# Altium PCB Circular PCB - Radial.PcbDoc (part 3 of 4)
Units mm, origin at the board's own origin, x right, y up, seen from the top; angles counter-clockwise.
Board outline 100 x 100 mm, 6 copper layers (Top Layer, GND (Top), X, Y, GND (Bot), Bottom Layer), stack 1.599 mm thick; 194 components, 127 nets, 612 pads, 161 vias.
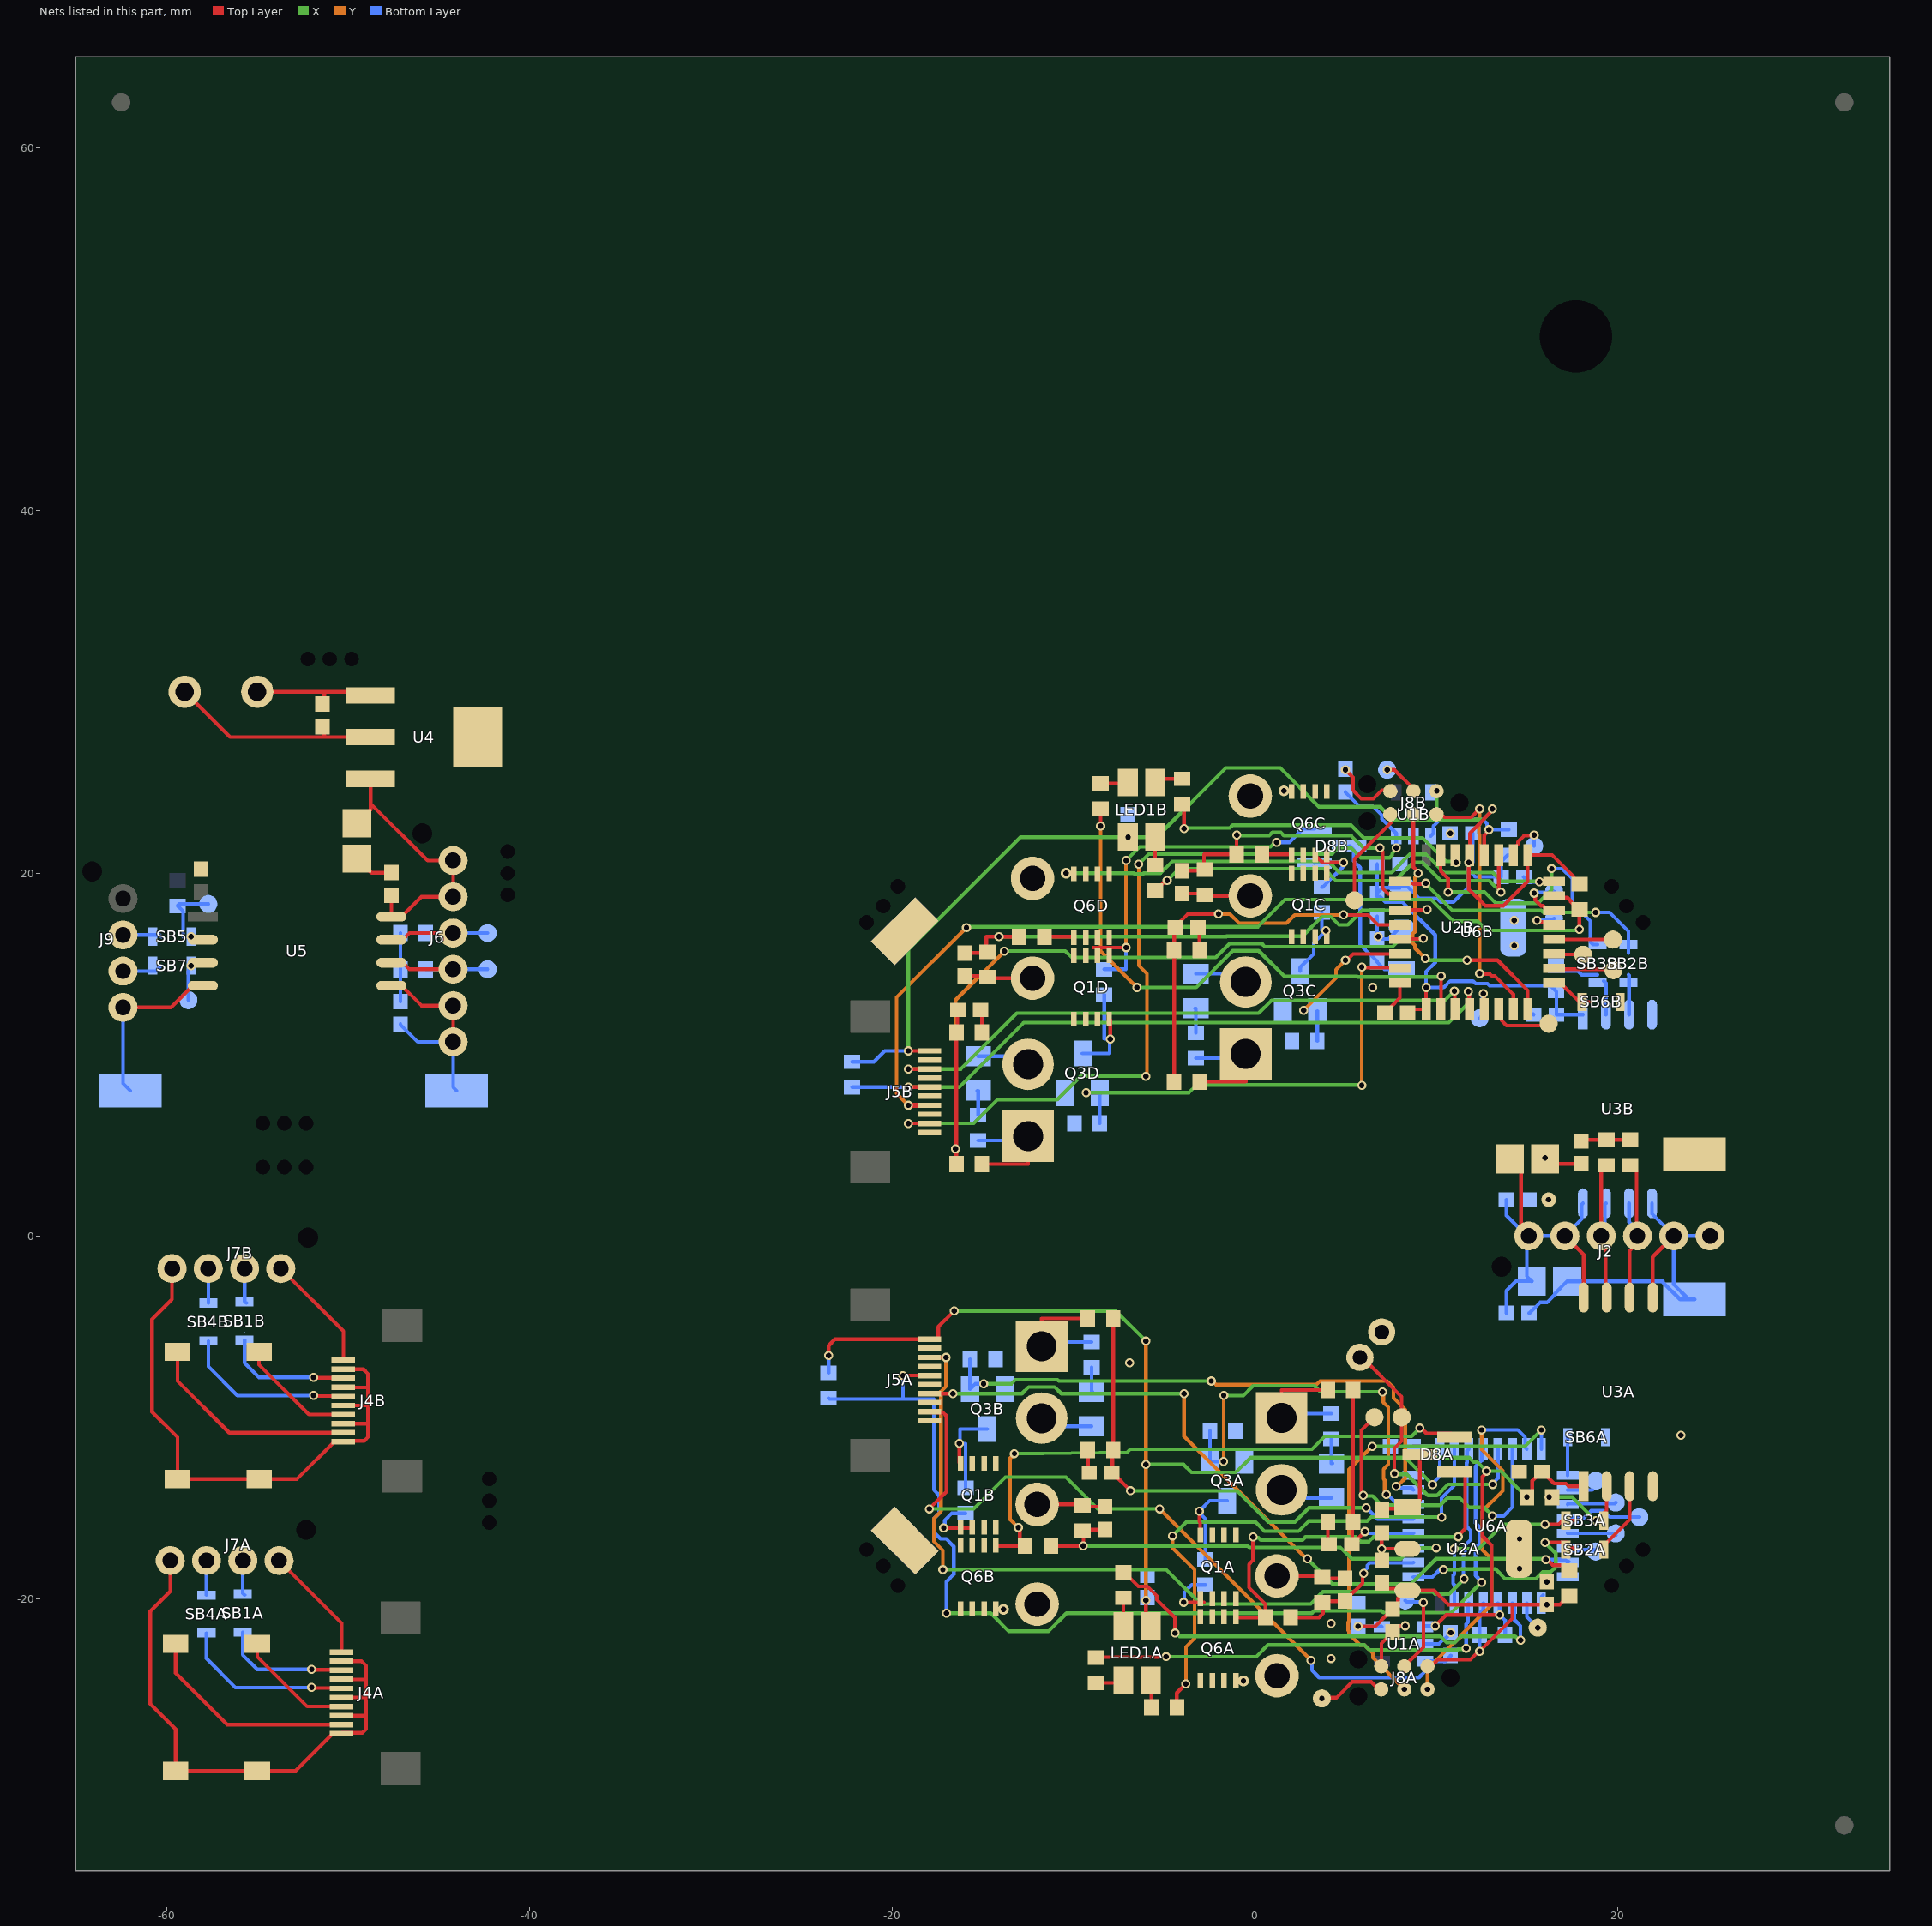
[diagram p6: the nets of this part, all layers, seen from the top]

## Via types
v1: diameter 0.5, hole 0.3, Top Layer to Bottom Layer, tented both sides, 151 vias
v2: diameter 0.5, hole 0.3, Top Layer to Bottom Layer, 4 vias
v3: diameter 0.6, hole 0.3, Top Layer to Bottom Layer, tented both sides, 4 vias
v4: diameter 0.8, hole 0.3, Top Layer to Bottom Layer, tented both sides, 2 vias

## Nets (pads, with @x,y where several pads share a name; then routed paths per layer and width w, separated by ;. In a path a pad name is that pad's centre, name@x,y a point inside that pad or via, vN(x,y) a via of type N, cw(c..) or ccw(c..) an arc to the next point about the centre after c; other vN are vias at no path point) (continued)
3V3A: C1A.1 C3A.1 C4A.1 C7A.1 C9A.1 C10A.1 C11A.1 J5A.1 J8A.1 LED1A.1 R8A.2 R9A.2 R10A.2 R37A.2 U1A.5 U2A.3 U3A.1 U6A.1 U6A.5 U6A.17 | length 102.7
  Top Layer w0.2: v1(-23.5,-6.6) -23.5,-6.05 -23.15,-5.7 J5A.1@-17.95,-5.7 -17.45,-5.7 -17.45,-5.01 v1(-16.58,-4.14) ; v1(-6,-20.1) -6,-21.25 LED1A.1@-5.75,-21.5 ; v1(5.7,-21.525) 6.65,-21.525 7.275,-20.9 7.3,-20.9 7.6,-20.6 C4A.1@7.6,-20.575 7.9,-20.275 7.9,-19.974 8.299,-19.575 U2A.3@8.4,-19.575 ; C3A.1@7,-19.15 7.25,-19.4 7.275,-19.4 7.314,-19.439 8.314,-19.439 U2A.3@8.425,-19.55 9.89,-19.55 10.665,-20.325 13.05,-20.325 ; J8A.1@9.52,-23.73 9.746,-23.73 10.114,-23.363 11.883,-23.363 12.346,-22.9 v1(12.4,-22.9) 14.2,-21.1 14.2,-20.325 ; v1(12.776,-12.967) 12.776,-13.049 12.551,-13.274 12.551,-16.55 13.05,-17.049 13.05,-20.325 ; v2(15,-14.4) 15.3,-14.1 15.3,-13.5 C7A.1@15.8,-13 ; C7A.1@15.825,-13 15.85,-13 16.5,-13.65 17.154,-13.65 17.305,-13.801 U3A.1@18.13,-13.801 ; R9A.2@17.35,-19.85 17.3,-19.85 16.825,-20.325 v1(16.1,-20.325) 14.2,-20.325 ; 13.05,-20.325 14.2,-20.325
  X w0.2: v1(-16.58,-4.14) -7.66,-4.14 v1(-6,-5.8) ; v1(-6,-12.6) -3.93,-12.6 -3.492,-13.037 -1.048,-13.037 -0.235,-12.225 8.316,-12.225 ; v1(9.798,-13.707) 8.316,-12.225 ; v2(15,-14.4) 13.567,-12.967 v1(12.776,-12.967) 12.28,-12.471 12.071,-12.471 11.825,-12.225 8.316,-12.225
  Y w0.2: v1(-6,-20.1) v1(-6,-12.6) v1(-6,-5.8)
  Bottom Layer w0.2: R37A.2@-23.5,-7.55 v1(-23.5,-6.6) ; v1(5.7,-21.525) 5.712,-21.537 6.987,-21.537 U1A.5@7,-21.55 ; C1A.1@8.725,-11.6 10.1,-11.6 10.2,-11.7 U6A.17@10.2,-11.75 10.2,-13.251 9.798,-13.653 v1(9.798,-13.707) ; v1(12.4,-22.9) R8A.2@12.4,-22 12.4,-20.8 12.6,-20.6 U6A.5@12.6,-20.25 ; U6A.1@15.8,-20.25 15.8,-19.9 U6A.1@15.9,-19.8
3V3B: C1B.1 C3B.1 C4B.1 C7B.1 C9B.1 C10B.1 C11B.1 J5B.1 J8B.1 LED1B.1 R8B.2 R9B.2 R10B.2 R37B.2 U1B.5 U2B.3 U3B.1 U6B.1 U6B.5 U6B.17 | length 97.4
  Top Layer w0.2: v1(-19.1,10.2) J5B.1@-17.95,10.2 ; C1B.1@8.425,12.3 8.625,12.5 U6B.17@9.45,12.5 v1(9.45,13.7) ; J8B.1@10.02,24.52 v1(10.032,24.532) ; v1(11.8,20.591) 11.8,19.1 12.7,18.2 13.7,18.2 15.05,19.55 U6B.1@15.05,21 16.395,21 17.6,19.795 17.6,19.65 17.85,19.4 R9B.2@17.9,19.4 ; U6B.5@11.85,21 11.85,22.199 12.651,23 12.651,23.024 13.1,23.472 v1(13.1,23.552)
  X w0.2: v1(-19.1,10.2) -19.1,15.8 -12.912,21.988 v1(-6.987,21.988) -5.412,21.988 -1.6,25.8 1.4,25.8 3.534,23.666 6.922,23.666 7.638,22.95 10,22.95 ; v1(10.032,24.532) 10.032,22.982 10,22.95 ; v1(13.1,23.552) 13.1,23.472 12.578,22.95 10,22.95
  Bottom Layer w0.2: R37B.2@-22.2,9.6 -21,9.6 -20.4,10.2 v1(-19.1,10.2) ; C4B.1@6.75,20.5 C3B.1@6.75,18.875 ; U1B.5@9.7,24.45 U1B.5@9.7,24.6 ; C10B.1@12.025,22.2 12.025,20.591 v1(11.8,20.591) 11.8,20.1 ; C9B.1@13.463,19.8 12.154,19.8 11.854,20.1 11.8,20.1 ; C9B.1@13.575,19.8 13.575,20.625 13.95,21 R8B.2@14,21 ; U3B.1@18.094,12.2 C7B.1@16.625,12.2 16.625,13.475 16.3,13.8 12.939,13.8 12.828,13.911 12.172,13.911 12.036,14.048 10.774,14.048 10.427,13.7 v1(9.45,13.7) 9.45,14.572 9.95,15.072 9.95,16.599 8.149,18.4 7.2,18.4 6.9,18.7 6.75,18.7 C3B.1@6.75,18.875 ; C3B.1@6.75,18.875 6.75,18.9 7.05,19.2 8,19.2 U2B.3@8.1,19.3 8.386,19.3 9.086,18.6 10.059,18.6 10.244,18.415 10.955,18.415 11.8,19.259 11.8,20.1
9V_BATT: C15.1 TP14.1 U4.1 | length 7
  Top Layer w0.2: TP14.1@-55,30 -48.95,30 U4.1@-48.75,29.8 ; C15.1@-51.4,29.325 -51.3,29.425 -51.3,30
BOOT0A: J5A.7 R9A.1 U6A.31 | length 43.5
  Top Layer w0.2: J5A.7@-17.95,-8.7 v1(-16.65,-8.7) ; v1(16.047,-17.847) 16.129,-17.847 16.431,-18.15 17.05,-18.15 R9A.1@17.35,-18.45
  X w0.2: v1(-16.65,-8.7) -12.836,-8.7 -12.463,-8.328 -11.037,-8.328 -10.664,-8.7 v1(-3.9,-8.7) ; v1(2.9,-17.8) 4.3,-19.2 8.6,-19.2 10,-17.8 16,-17.8 v1(16.047,-17.847)
  Y w0.2: v1(-3.9,-8.7) -3.9,-11.058 2.842,-17.8 v1(2.9,-17.8)
  Bottom Layer w0.2: v1(16.047,-17.847) 16.597,-17.847 16.6,-17.85 17.1,-17.85 U6A.31@17.25,-18 U6A.31@17.3,-17.95
BOOT0B: J5B.7 R9B.1 U6B.31 | length 50.8
  Top Layer w0.2: U6B.31@16.5,18.75 16.6,18.65 17.249,18.65 17.425,18.474 17.425,18.425 R9B.1@17.85,18 ; v1(17.9,16.9) R9B.1@17.9,18
  Top Layer w0.3: v1(-19.1,7.2) J5B.7@-17.95,7.2
  X w0.2: v1(-15.9,17) -15.85,17.05 0.171,17.05 1.671,18.55 9.728,18.55 10.927,17.351 12.275,17.351 12.776,16.85 17.85,16.85 v1(17.9,16.9)
  Y w0.2: v1(-19.1,7.2) -19.75,7.85 -19.75,13.15 v1(-15.9,17)
CANHA: J2.3 R13.2 U3A.7 U3B.7 | length 9.5
  Top Layer w0.2: U3A.7@19.4,-3.4 19.335,-3.335 19.335,-0.235 J2.3@19.1,0 19.1,3.6 R13.2@19.4,3.9
  Bottom Layer w0.2: J2.3@19.1,0 19.3,0.2 19.3,1.734 U3B.7@19.365,1.799
CANLA: J2.4 R14.2 U3A.6 U3B.6 | length 9.7
  Top Layer w0.2: U3A.6@20.67,-3.4 20.67,-0.809 21.1,-0.379 J2.4@21.1,0 21.05,0.05 21.05,3.6 20.75,3.9 R14.2@20.7,3.9
  Bottom Layer w0.2: U3B.6@20.635,1.799 20.635,0.764 21.1,0.299 J2.4@21.1,0
GND: C18.2 J9.4 TP21.1 U5.4 | length 9.7
  Top Layer w0.2: J9.4@-62.4,12.6 -59.751,12.6 -58.556,13.795 U5.4@-58.001,13.795
  Bottom Layer w0.2: J9.4@-62.4,12.6 -62.4,8.4 TP21.1@-62,8
GNDA: C1A.2 C2A.2 C3A.2 C4A.2 C7A.2 C8A.2 C9A.2 C10A.2 C11A.2 C12A.2 C12B.2 C13A.2 C13B.2 J1A.2 J1B.2 J3A.2 J3B.2 J5A.2 J5A.4 J5A.6 J5A.8 J5A.10 J8A.5 LED2A.1 LED2B.1 pad.1@7,-5.3 Q3A.2 Q3B.2 Q6A.4 Q6B.4 R3A.1 R3B.1 R4A.1 R4B.1 R12A.1 R12B.1 SB6A.1 TP1A.1 TP2A.1 U1A.2 U2A.2 U2A.4 U3A.4 U6A.16 U6A.32 | length 25.6
  Top Layer w0.2: Q6B.4@-14.275,-20.553 -14.238,-20.59 v3(-13.85,-20.59) ; J1B.2@-12,-14.8 -9.45,-14.8 R4B.1@-9.45,-14.89 ; R4B.1@-9.55,-14.89 -9.55,-14.925 C12B.2@-8.25,-14.925 ; R12B.1@-9.2,-11.8 -9.2,-13.09 C13B.2@-9.15,-13.09 ; Q6A.4@-1.05,-24.5 -1.013,-24.537 v3(-0.625,-24.537) ; J1A.2@1.225,-18.747 3.675,-18.747 3.775,-18.747 R4A.1@3.775,-18.837 ; R4A.1@3.675,-18.837 3.675,-18.872 3.775,-18.872 C12A.2@4.975,-18.872 ; R12A.1@4.025,-15.747 4.025,-17.037 C13A.2@4.075,-17.037 ; J8A.5@6.98,-23.73 6.98,-22.47 7.6,-21.85 C4A.2@7.6,-21.825 7.6,-21.8 7.9,-21.5 v1(8.3,-21.5) ; C3A.2@7,-17.875 v1(7,-17.25) ; C2A.2@7,-16.375 v1(7,-17.25) ; U2A.2@8.425,-17.25 v1(7,-17.25)
  Bottom Layer w0.2: J3B.2@-11.65,-9.89 -11.65,-10.5 LED2B.1@-9,-10.5 ; J3A.2@1.575,-13.837 1.575,-14.447 LED2A.1@4.225,-14.447 ; U1A.2@9.4,-22.5 10.15,-22.5 10.45,-22.2 10.5,-22.2 10.8,-21.9 v1(10.8,-21.875)
  other v1: 4.2,-23.3 4.2,-21.375 16.1,-19.075 14.6,-18.35 14.6,-16.7 23.5,-11 -6.9,-7
GNDB: C1B.2 C2B.2 C3B.2 C4B.2 C7B.2 C8B.2 C9B.2 C10B.2 C11B.2 C12C.2 C12D.2 C13C.2 C13D.2 J1C.2 J1D.2 J3C.2 J3D.2 J5B.2 J5B.4 J5B.6 J5B.8 J5B.10 J8B.5 LED2C.1 LED2D.1 Q3C.2 Q3D.2 Q6C.4 Q6D.4 R3C.1 R3D.1 R4C.1 R4D.1 R12C.1 R12D.1 SB6B.1 TP1B.1 TP2B.1 U1B.2 U2B.2 U2B.4 U3B.4 U6B.16 U6B.32 | length 58
  Top Layer w0.2: C12D.2@-16,14.335 -14.7,14.335 R4D.1@-14.7,14.3 ; C13D.2@-15.1,12.5 -15.05,12.5 R12D.1@-15.05,11.21 ; R4D.1@-14.8,14.3 -14.8,14.21 J1D.2@-12.25,14.21 ; v3(-10.4,20) -10.012,20 Q6D.4@-9.975,19.963 ; C12C.2@-4,18.875 -2.7,18.875 R4C.1@-2.7,18.84 ; C13C.2@-3.1,17.04 -3.05,17.04 R12C.1@-3.05,15.75 ; R4C.1@-2.8,18.84 -2.8,18.75 J1C.2@-0.25,18.75 ; v3(1.6,24.54) 1.988,24.54 Q6C.4@2.025,24.503 ; v1(5,25.7) 5.413,25.287 5.413,24.571 5.88,24.104 6.54,24.104 7.007,24.571 7.429,24.571 J8B.5@7.48,24.52 ; C1B.2@7.175,12.3 7.2,12.3 7.5,12.6 7.5,12.625 8,13.125 U6B.16@8,13.95 ; v1(15.704,19.531) 15.714,19.54 16.49,19.54 U6B.32@16.5,19.55
  X w0.2: v3(-10.4,20) -6.678,20 -6.628,19.95 -6.172,19.95 -6.122,20 -5.205,20 -4.555,20.65 4.063,20.65 4.672,20.041 7.545,20.041 8.548,21.044 9.441,21.044 10.444,20.041 13.119,20.041 13.61,19.55 v1@15.704,19.55
  Bottom Layer w0.2: LED2D.1@-15.25,9.91 -12.6,9.91 J3D.2@-12.6,9.3 ; LED2C.1@-3.25,14.45 -0.6,14.45 J3C.2@-0.6,13.84 ; C3B.2@6.75,17.625 C2B.2@6.75,16.375 7.374,16.375 U2B.2@7.999,17 ; C4B.2@8,20.5 8.025,20.5 8.75,21.225 U1B.2@8.75,22.05 ; C9B.2@14.825,19.8 15.094,19.531 v1(15.704,19.531) ; C7B.2@15.35,12.225 C7B.2@15.375,12.2
  other v1: 6.5,13.7 14.3,16 6.8,16.5 14.3,17.4 10.775,22.2
ISO_5V: C16.1 C17.1 J6.1 J6.2 U4.3 U5.8 | length 15.7
  Top Layer w0.2: C17.1@-49.5,22.75 -49.475,22.75 -48.8,23.425 -48.8,23.45 -48.75,23.5 -48.75,23.848 ; U4.3@-48.75,25.2 -48.75,23.848 ; C16.1@-47.6,18.775 U5.8@-47.599,17.605 -47.044,17.605 -45.949,18.7 J6.2@-44.2,18.7 J6.1@-44.2,20.7 -45.602,20.7 -48.75,23.848
ISO_5VA: C5A.1 C5B.1 C6A.1 C6B.1 J2.1 J2.2 U3A.8 U3B.8 | length 20.6
  Top Layer w0.2: C6B.1@14.05,4.25 14.675,3.625 14.675,0.677 15,0.352 J2.1@15,0 ; J2.2@17.1,0 18.13,-1.03 U3A.8@18.13,-3.4
  Bottom Layer w0.2: C5A.1@13.875,-4.25 13.875,-3.021 14.397,-2.5 C6A.1@15.275,-2.5 15,-2.225 15,0 13.875,1.125 C5B.1@13.875,2 C5B.1@13.878,2.003 ; J2.1@15.1,0 J2.2@17.1,0 18.03,0.93 18.03,1.734 U3B.8@18.095,1.799
ISO_GND: C15.2 C16.2 C17.2 C19.2 J6.5 J6.6 TP15.1 TP22.1 U4.2 U4.4 U5.5 | length 26.1
  Top Layer w0.2: TP15.1@-59,30 -56.5,27.5 U4.2@-48.75,27.5 ; C15.2@-51.4,28.075 -51.3,27.975 -51.3,27.5 ; C17.2@-49.5,20.8 -49.475,20.8 -48.7,20.025 C16.2@-47.6,20.025 ; U5.5@-47.599,13.795 -47.044,13.795 -45.949,12.7 J6.5@-44.2,12.7 J6.6@-44.2,10.7
  Bottom Layer w0.2: C19.2@-47.1,11.675 -47.1,11.65 -46.15,10.7 J6.6@-44.2,10.7 -44.2,8.2 TP22.1@-44,8
ISO_GNDA: C5A.2 C5B.2 C6A.2 C6B.2 C14.2 J2.5 J2.6 TP16A.1 TP16B.1 U3A.5 U3B.5 | length 24.5
  Top Layer w0.2: C6B.2@16,4.25 16.275,3.975 C14.2@18,3.975 ; U3A.5@21.94,-3.4 21.94,-1.16 J2.5@23.1,0
  Bottom Layer w0.2: C5A.2@15.125,-4.25 15.15,-4.25 15.733,-3.667 16.107,-3.667 16.55,-3.224 16.55,-3.175 C6A.2@17.225,-2.5 22.5,-2.5 22.5,-2.55 23.45,-3.5 TP16A.1@23.925,-3.5 ; U3B.5@21.905,1.799 21.905,1.219 23.1,0.024 J2.5@23.1,0 ; TP16A.1@24.25,-3.5 TP16A.1@23.925,-3.5 ; J2.6@25.1,0 J2.5@23.1,0 ; J2.5@23.1,0 23.1,-2.675 TP16A.1@23.925,-3.5
  other v4: 16.2,2 16,4.3
LED_BLUEA: R5A.1 U6A.18 | length 30.1
  Top Layer w0.2: R5A.1@-4.3,-26 -4.3,-25.2 v1(-3.8,-24.7)
  X w0.2: v1(-4.539,-16.539) -3.77,-15.77 0.034,-15.77 0.534,-16.27 2.416,-16.27 2.962,-15.724 6.19,-15.724 6.414,-15.5 v1(10.3,-15.5)
  Y w0.2: v1(-4.539,-16.539) -4.539,-17.191 -3.325,-18.404 -3.325,-22.18 -3.8,-22.655 v1(-3.8,-24.7)
  Bottom Layer w0.2: v1(10.3,-15.5) 10.3,-14.45 11,-13.75 U6A.18@11,-11.75
LED_BLUEB: R5B.1 U6B.18 | length 30.7
  Top Layer w0.2: v1(-8.5,22.6) R5B.1@-8.5,23.55 ; U6B.18@10.25,12.5 10.275,12.525 v1@10.275,14.325
  X w0.2: v1(-6.5,13.7) -3.236,13.7 -1.213,15.722 0.213,15.722 1.636,14.3 5.65,14.3 5.672,14.278 10.227,14.278 v1(10.274,14.326)
  Y w0.2: v1(-8.5,22.6) -8.5,15.7 v1(-6.5,13.7)
LED_GREENA: R6A.1 U6A.6 | length 23.4
  Top Layer w0.2: R6A.1@-8.75,-23.25 -8.725,-23.225 -4.925,-23.225 v1(-4.9,-23.2)
  X w0.2: v1(-4.9,-23.2) 0.08,-23.2 0.729,-22.552 6.04,-22.552 6.314,-22.825 11.194,-22.825 11.228,-22.79 11.593,-22.79 v1(11.65,-22.733)
  Bottom Layer w0.2: v1(11.65,-22.733) 11.65,-21.405 11.755,-21.3 11.755,-20.295 U6A.6@11.8,-20.25
LED_GREENB: R6B.1 U6B.6 | length 17.8
  Top Layer w0.2: R6B.1@-4,23.8 -3.9,23.7 v1(-3.9,22.452) ; U6B.6@11.05,21 11.05,20.641 v1(11.1,20.591)
  X w0.2: v1(-3.9,22.452) -3.852,22.5 -1.378,22.5 -1.228,22.65 0.802,22.65 0.804,22.652 1.591,22.652 1.592,22.65 5.301,22.65 6.001,21.95 9.25,21.95 10.552,20.648 11.043,20.648 v1(11.1,20.591)
LED_REDA: R7A.1 U6A.3 | length 26.6
  Top Layer w0.2: R7A.1@-7.25,-18.55 -7.2,-18.55 -6.424,-19.326 -5.926,-19.326 -5.4,-19.851 -5.4,-20.055 -4.4,-21.055 v1(-4.4,-21.9)
  X w0.2: v1(-4.4,-21.9) -4.319,-21.9 -4.144,-22.075 10.222,-22.075 10.572,-22.425 11.028,-22.425 11.378,-22.075 14.347,-22.075 14.572,-22.3 v1(14.65,-22.3)
  Bottom Layer w0.2: U6A.3@14.2,-20.25 14.3,-20.35 14.3,-21.155 14.65,-21.505 v1(14.65,-22.3)
LED_REDB: R7B.1 U6B.3 | length 23
  Top Layer w0.2: R7B.1@-5.5,19.05 -5.45,19.05 -4.947,19.553 -4.875,19.553 v1(-4.837,19.591) ; U6B.3@13.45,21 13.45,19.128 13.573,19.004 v1(13.573,18.95)
  X w0.2: v1(-4.837,19.591) -4.177,20.25 3.827,20.25 4.486,19.591 7.731,19.591 8.734,20.594 9.255,20.594 10.258,19.591 12.933,19.591 v1(13.573,18.95)
LPUART1_RXA: SB2A.1 U6A.9 | length 11.9
  Top Layer w0.2: v2(16,-16.9) 17.212,-16.9 SB2A.1@17.612,-17.3
  X w0.2: v1(10.4,-18.4) 11.276,-18.4 11.308,-18.368 13.268,-18.368 13.8,-18.9 15.497,-18.9 15.872,-18.525 16.328,-18.525 16.597,-18.255 16.597,-17.497 v2(16,-16.9)
  Bottom Layer w0.2: U6A.9@8.75,-18.8 9.8,-18.8 10.162,-18.438 10.362,-18.438 v1(10.4,-18.4)
LPUART1_RXB: SB2B.1 U6B.9 | length 15
  Top Layer w0.2: U6B.9@8,19.55 8.1,19.45 8.701,19.45 8.758,19.394 9.335,19.394 9.384,19.443 v1(9.438,19.443)
  X w0.2: v1(9.438,19.443) 9.438,19.405 10.893,17.95 15.792,17.95 15.907,17.835 v1(18.8,17.835)
  Bottom Layer w0.2: v1(18.8,17.835) 19.565,17.835 20.6,16.8 SB2B.1@20.6,15.6
LPUART1_TXA: SB3A.1 U6A.7 | length 10.3
  Top Layer w0.2: v1(16,-15.9) 16.747,-15.9 16.947,-15.7 SB3A.1@17.612,-15.7
  X w0.2: v1(11,-17.25) 12.35,-17.25 13.7,-15.9 v1(16,-15.9)
  Bottom Layer w0.2: U6A.7@11,-20.25 11,-19.231 10.936,-19.167 10.936,-18.713 11,-18.649 v1(11,-17.25)
LPUART1_TXB: SB3B.1 U6B.7 | length 15.4
  Top Layer w0.2: U6B.7@10.25,21 10.25,20.116 10.657,19.71 v1(10.657,18.965)
  X w0.2: v1(10.657,18.965) 12.665,18.965 13.279,18.35 15.628,18.35 16.367,19.089 v1(16.367,20.25)
  Bottom Layer w0.2: v1(16.367,20.25) 16.95,20.25 17.5,19.7 17.5,18.358 18.5,17.358 18.5,16.212 18.65,16.063 SB3B.1@18.9,16.063
NetC2A_1: C2A.1 D8A.3 U2A.1 | length 4.8
  Top Layer w0.2: C2A.1@7,-15.125 7.088,-15.037 8.338,-15.037 U2A.1@8.425,-14.95 8.711,-14.95 9.1,-14.561 D8A.3@9.1,-12.05
NetC2B_1: C2B.1 D8B.3 U2B.1 | length 8.6
  Bottom Layer w0.2: D8B.3@5.2,21.5 5.25,21.5 5.45,21.3 5.45,20.668 5.813,20.305 5.813,16.063 6.426,15.45 6.45,15.45 6.75,15.15 C2B.1@6.75,15.125 6.75,15.1 7.15,14.7 U2B.1@8.1,14.7
NetC14_1: C14.1 R13.1 R14.1 | length 2.7
  Top Layer w0.2: C14.1@18,5.225 18.075,5.3 R14.1@20.7,5.3
NetC19_1: C19.1 R16.1 R17.1 | length 3.8
  Bottom Layer w0.2: C19.1@-47.1,12.925 R17.1@-47.1,16.7
NetJ1A_1: J1A.1 Q6A.1 Q6A.2 Q6A.3
NetJ1B_1: J1B.1 Q6B.1 Q6B.2 Q6B.3
NetJ1C_1: J1C.1 Q6C.1 Q6C.2 Q6C.3
NetJ1D_1: J1D.1 Q6D.1 Q6D.2 Q6D.3
NetJ3A_1: J3A.1 Q1A.1 Q1A.2 Q1A.3 R11A.2 R22A.2 | length 7.1
  Top Layer w0.2: J3A.1@1.475,-10.037 1.475,-8.497 R11A.2@4.025,-8.497
  Bottom Layer w0.2: J3A.1@1.475,-10.037 1.475,-9.797 R22A.2@4.225,-9.797
NetJ3B_1: J3B.1 Q1B.1 Q1B.2 Q1B.3 R11B.2 R22B.2 | length 7.1
  Top Layer w0.2: J3B.1@-11.75,-6.09 -11.75,-4.55 R11B.2@-9.2,-4.55
  Bottom Layer w0.2: J3B.1@-11.75,-6.09 -11.75,-5.85 R22B.2@-9,-5.85
NetJ3C_1: J3C.1 Q1C.1 Q1C.2 Q1C.3 R11C.2 R22C.2 | length 7.1
  Top Layer w0.2: R11C.2@-3.05,8.5 -0.5,8.5 J3C.1@-0.5,10.04
  Bottom Layer w0.2: R22C.2@-3.25,9.8 -0.5,9.8 J3C.1@-0.5,10.04
NetJ3D_1: J3D.1 Q1D.1 Q1D.2 Q1D.3 R11D.2 R22D.2 | length 7.1
  Top Layer w0.2: R11D.2@-15.05,3.96 -12.5,3.96 J3D.1@-12.5,5.5
  Bottom Layer w0.2: R22D.2@-15.25,5.26 -12.5,5.26 J3D.1@-12.5,5.5
NetJ4A_1: J4A.1 J4A.3 J4A.5 J4A.7 J4A.9 J7A.4 SW1A.1 SW2A.1 | length 33.2
  Top Layer w0.2: J7A.4@-59.8,-17.9 -59.8,-19.6 -60.9,-20.7 -60.9,-25.8 -59.5,-27.2 SW2A.1@-59.5,-29.5 SW1A.1@-55,-29.5 -52.9,-29.5 -50.85,-27.45 J4A.1@-50.35,-27.45 -50.3,-27.4 -49.2,-27.4 -49,-27.2 -49,-26.5 ; J4A.3@-50.35,-26.45 -49.05,-26.45 -49,-26.5 ; J4A.5@-50.35,-25.45 -49.05,-25.45 -49,-25.5 ; J4A.7@-50.35,-24.45 -49.05,-24.45 -49,-24.4 ; J4A.9@-50.35,-23.45 -49.25,-23.45 -49,-23.7 -49,-24.4 ; -49,-26.5 -49,-25.5 ; -49,-25.5 -49,-24.4
NetJ4A_2: J4A.2 SW2A.2 | length 11.9
  Top Layer w0.2: SW2A.2@-59.5,-22.5 -59.5,-24.1 -56.65,-26.95 J4A.2@-50.35,-26.95
NetJ4A_4: J4A.4 SW1A.2 | length 6.5
  Top Layer w0.2: SW1A.2@-55,-22.5 -55,-23.2 -52.25,-25.95 J4A.4@-50.35,-25.95
NetJ4A_6: J4A.6 SB4A.2 | length 9.5
  Top Layer w0.2: v1(-52,-24.9) -51.975,-24.925 -50.375,-24.925 J4A.6@-50.35,-24.95
  Bottom Layer w0.2: SB4A.2@-57.8,-21.9 -57.8,-23.3 -56.2,-24.9 v1(-52,-24.9)
NetJ4A_8: J4A.8 SB1A.2 | length 7.1
  Top Layer w0.2: v1(-52,-23.9) -51.975,-23.925 -50.375,-23.925 J4A.8@-50.35,-23.95
  Bottom Layer w0.2: SB1A.2@-55.8,-21.85 -55.8,-23.1 -55,-23.9 v1(-52,-23.9)
NetJ4A_10: J4A.10 J7A.1 | length 6.5
  Top Layer w0.2: J7A.1@-53.8,-17.9 -50.35,-21.35 J4A.10@-50.35,-22.95
NetJ4B_1: J4B.1 J4B.3 J4B.5 J4B.7 J4B.9 J7B.4 SW1B.1 SW2B.1 | length 33.2
  Top Layer w0.2: J7B.4@-59.7,-1.8 -59.7,-3.5 -60.8,-4.6 -60.8,-9.7 -59.4,-11.1 SW2B.1@-59.4,-13.4 SW1B.1@-54.9,-13.4 -52.8,-13.4 -50.75,-11.35 J4B.1@-50.25,-11.35 -50.2,-11.3 -49.1,-11.3 -48.9,-11.1 -48.9,-10.4 ; J4B.3@-50.25,-10.35 -48.95,-10.35 -48.9,-10.4 ; J4B.5@-50.25,-9.35 -48.95,-9.35 -48.9,-9.4 ; J4B.7@-50.25,-8.35 -48.95,-8.35 -48.9,-8.3 ; J4B.9@-50.25,-7.35 -49.15,-7.35 -48.9,-7.6 -48.9,-8.3 ; -48.9,-10.4 -48.9,-9.4 ; -48.9,-9.4 -48.9,-8.3
NetJ4B_2: J4B.2 SW2B.2 | length 11.9
  Top Layer w0.2: SW2B.2@-59.4,-6.4 -59.4,-8 -56.55,-10.85 J4B.2@-50.25,-10.85
NetJ4B_4: J4B.4 SW1B.2 | length 6.5
  Top Layer w0.2: SW1B.2@-54.9,-6.4 -54.9,-7.1 -52.15,-9.85 J4B.4@-50.25,-9.85
NetJ4B_6: J4B.6 SB4B.2 | length 9.5
  Top Layer w0.2: v1(-51.9,-8.8) -51.875,-8.825 -50.275,-8.825 J4B.6@-50.25,-8.85
  Bottom Layer w0.2: SB4B.2@-57.7,-5.8 -57.7,-7.2 -56.1,-8.8 v1(-51.9,-8.8)
NetJ4B_8: J4B.8 SB1B.2 | length 7.1
  Top Layer w0.2: v1(-51.9,-7.8) -51.875,-7.825 -50.275,-7.825 J4B.8@-50.25,-7.85
  Bottom Layer w0.2: SB1B.2@-55.7,-5.75 -55.7,-7 -54.9,-7.8 v1(-51.9,-7.8)
NetJ4B_10: J4B.10 J7B.1 | length 6.5
  Top Layer w0.2: J7B.1@-53.7,-1.8 -50.25,-5.25 J4B.10@-50.25,-6.85
NetJ6_3: J6.3 R17.2 TP17.1 U5.7 | length 7
  Top Layer w0.2: U5.7@-47.599,16.335 -46.966,16.335 -46.601,16.7 J6.3@-44.2,16.7
  Bottom Layer w0.2: R17.2@-45.7,16.7 J6.3@-44.2,16.7 TP17.1@-42.3,16.7
NetJ6_4: J6.4 R16.2 TP18.1 U5.6 | length 7
  Top Layer w0.2: U5.6@-47.599,15.065 -46.966,15.065 -46.601,14.7 J6.4@-44.2,14.7
  Bottom Layer w0.2: R16.2@-45.7,14.7 J6.4@-44.2,14.7 TP18.1@-42.3,14.7
NetJ7A_2: J7A.2 SB1A.1 | length 1.9
  Bottom Layer w0.2: J7A.2@-55.8,-17.9 -55.8,-19.7 SB1A.1@-55.7,-19.8
NetJ7A_3: J7A.3 SB4A.1 | length 1.9
  Bottom Layer w0.2: SB4A.1@-57.8,-19.8 J7A.3@-57.8,-17.9
NetJ7B_2: J7B.2 SB1B.1 | length 1.9
  Bottom Layer w0.2: J7B.2@-55.7,-1.8 -55.7,-3.6 SB1B.1@-55.6,-3.7
NetJ7B_3: J7B.3 SB4B.1 | length 1.9
  Bottom Layer w0.2: SB4B.1@-57.7,-3.7 J7B.3@-57.7,-1.8
NetJ8A_3: J8A.3 TP10A.1 | length 5
  Top Layer w0.2: J8A.3@8.25,-23.73 9.3,-22.68 v1(9.3,-20.219)
  Bottom Layer w0.2: TP10A.1@8.3,-20.1 8.38,-20.18 9.262,-20.18 v1(9.3,-20.219)
NetJ8A_6: J8A.6 TP11A.1 | length 3.8
  Top Layer w0.2: v1(3.7,-25.5) 3.737,-25.463 4.5,-25.463 5.38,-24.584 6.414,-24.584 6.83,-25 J8A.6@6.98,-25
NetJ8B_3: J8B.3 TP10B.1 | length 2
  Top Layer w0.2: v1(7.3,25.7) 7.302,25.698 7.702,25.698 8.75,24.65 J8B.3@8.75,24.52
NetJ8B_6: J8B.6 TP11B.1 | length 5.1
  Top Layer w0.2: TP11B.1@5.5,18.5 5.5,20.778 7.5,22.778 7.5,22.8
NetJ9_2: J9.2 SB5.1 | length 2.2
  Bottom Layer w0.2: J9.2@-62.4,16.6 -60.387,16.6 SB5.1@-60.287,16.5
NetJ9_3: J9.3 SB7.1 | length 2.2
  Bottom Layer w0.2: J9.3@-62.4,14.6 -60.588,14.6 SB7.1@-60.287,14.9
NetLED1A_2: LED1A.2 R5A.2 | length 1.5
  Top Layer w0.2: LED1A.2@-5.75,-24.5 -5.7,-24.55 R5A.2@-5.7,-26
NetLED1A_3: LED1A.3 R6A.2 | length 1.6
  Top Layer w0.2: R6A.2@-8.75,-24.65 -7.4,-24.65 LED1A.3@-7.25,-24.5
NetLED1A_4: LED1A.4 R7A.2 | length 1.6
  Top Layer w0.2: LED1A.4@-7.25,-21.5 R7A.2@-7.25,-19.95
NetLED1B_2: LED1B.2 R5B.2 | length 1.5
  Top Layer w0.2: R5B.2@-8.5,24.95 -7.05,24.95 LED1B.2@-7,25
NetLED1B_3: LED1B.3 R6B.2 | length 1.6
  Top Layer w0.2: LED1B.3@-5.5,25 -5.3,25.2 R6B.2@-4,25.2
NetLED1B_4: LED1B.4 R7B.2 | length 1.6
  Top Layer w0.2: R7B.2@-5.5,20.45 LED1B.4@-5.5,22
NetLED2A_2: LED2A.2 R22A.1 | length 1.4
  Bottom Layer w0.2: R22A.1@4.225,-11.197 4.225,-12.537 LED2A.2@4.275,-12.537
NetLED2B_2: LED2B.2 R22B.1 | length 1.4
  Bottom Layer w0.2: R22B.1@-9,-7.25 -9,-8.59 LED2B.2@-8.95,-8.59
NetLED2C_2: LED2C.2 R22C.1 | length 1.4
  Bottom Layer w0.2: LED2C.2@-3.3,12.54 -3.25,12.54 R22C.1@-3.25,11.2
NetLED2D_2: LED2D.2 R22D.1 | length 1.4
  Bottom Layer w0.2: LED2D.2@-15.3,8 -15.25,8 R22D.1@-15.25,6.66
NetQ1A_4: Q1A.4 Q3A.3 R1A.2 | length 5.9
  Top Layer w0.2: v1(-3.059,-15.17) -3.059,-15.745 -3.016,-15.788 -3.016,-16.428 Q1A.4@-3.025,-16.437
  Bottom Layer w0.2: v1(-3.059,-15.17) -3.059,-15.251 -2.725,-15.585 R1A.2@-2.725,-17.837 ; v1@-3.025,-15.17 -3.025,-15.136 -2.487,-14.597 Q3A.3@-1.525,-14.597
NetQ1B_4: Q1B.4 Q3B.3 R1B.2 | length 6.2
  Top Layer w0.2: v1(-16.284,-11.448) -16.284,-12.49 Q1B.4@-16.25,-12.49
  Bottom Layer w0.2: R1B.2@-15.95,-13.89 -15.95,-11.448 v1(-16.284,-11.448) -16.25,-11.414 -16.25,-10.65 Q3B.3@-14.75,-10.65
NetQ1C_4: Q1C.4 Q3C.3 R1C.2 | length 4.5
  Top Layer w0.2: v1(3.927,16.84) 3.927,16.513 Q1C.4@4,16.44
  Bottom Layer w0.2: Q3C.3@2.5,14.6 2.5,14.8 3.25,15.55 3.25,16.162 v1(3.927,16.84) 3.7,16.84 R1C.2@3.7,17.84
NetQ1D_4: Q1D.4 Q3D.3 R1D.2 | length 6.2
  Top Layer w0.2: Q1D.4@-8,11.9 -7.966,11.9 v1(-7.966,10.858)
  Bottom Layer w0.2: Q3D.3@-9.5,10.06 -8,10.06 -8,10.824 v1(-7.966,10.858) -8.3,10.858 R1D.2@-8.3,13.3
NetR10A_1: R10A.1 SB3A.2 U3A.2 | length 5
  Top Layer w0.2: v2(16.226,-14.4) R10A.1@16.4,-14.4 ; SB3A.2@19.156,-15.356 19.4,-15.112 U3A.2@19.4,-13.801
  X w0.2: v2(16.226,-14.4) 17.512,-14.4 v2(18.812,-15.7)
NetR10B_1: R10B.1 SB3B.2 U3B.2 | length 4.4
  Bottom Layer w0.2: R10B.1@16.6,14.9 16.9,14.6 17.825,14.6 18.025,14.4 SB3B.2@18.9,14.4 ; SB3B.2@19.244,14.056 19.365,13.935 U3B.2@19.365,12.201
NetR15_1: R15.1 SB5.2 TP19.1 U5.2 | length 4.3
  Top Layer w0.2: v1(-58.65,16.5) -58.485,16.335 U5.2@-58.001,16.335
  Bottom Layer w0.2: SB5.2@-59.088,16.5 -59.088,17.9 -59.388,18.2 R15.1@-59.4,18.2 -59.3,18.3 TP19.1@-57.7,18.3
NetSB2A_2: SB2A.2 U3A.3 | length 4.1
  Top Layer w0.2: SB2A.2@19.25,-17.3 19.25,-17.05 20.67,-15.63 U3A.3@20.67,-13.801
NetSB2B_2: SB2B.2 U3B.3 | length 2.2
  Bottom Layer w0.2: SB2B.2@20.6,14.4 20.635,14.365 U3B.3@20.635,12.201
NetSB6A_2: SB6A.2 U6A.25 | length 2.1
  Bottom Layer w0.2: U6A.25@17.25,-13.2 SB6A.2@17.25,-11.1
NetSB6B_2: SB6B.2 U6B.25 | length 2.4
  Top Layer w0.2: U6B.25@16.5,13.95 16.85,13.95 17.9,12.9 SB6B.2@18.488,12.9
NetSB7_2: SB7.2 TP20.1 U5.3 | length 2.3
  Top Layer w0.2: v1(-58.65,14.9) -58.485,15.065 U5.3@-58.001,15.065
  Bottom Layer w0.2: TP20.1@-58.8,13 SB7.2@-58.8,14.612
NetTP3A_1: TP3A.1 U6A.22 | length 17.1
  Top Layer w0.2: v1(5.975,-14.3) 5.975,-14.246 5.875,-14.146 5.875,-10.725 TP3A.1@6.6,-10
  X w0.2: v1(5.975,-14.3) 6.013,-14.338 6.504,-14.338 7.015,-14.85 10.211,-14.85 10.611,-14.45 11.315,-14.45 11.832,-14.968 12.648,-14.968 13.101,-15.42 v1(13.101,-15.434)
  Bottom Layer w0.2: v1(13.101,-15.434) 13.718,-15.434 14.2,-14.953 U6A.22@14.2,-11.75
NetTP3B_1: TP3B.1 U6B.22 | length 3.4
  Top Layer w0.2: U6B.22@13.45,12.5 13.6,12.35 13.6,11.876 13.876,11.6 16.1,11.6 TP3B.1@16.2,11.7
NetTP4A_1: TP4A.1 U6A.26 | length 1.4
  Bottom Layer w0.2: U6A.26@17.25,-14 18.6,-14
NetTP4B_1: TP4B.1 U6B.26 | length 3.3
  Top Layer w0.2: U6B.26@16.5,14.75 16.55,14.7 19.725,14.7 TP4B.1@19.775,14.65
NetTP5A_1: TP5A.1 U6A.29 | length 2.7
  Bottom Layer w0.2: U6A.29@17.25,-16.4 19.8,-16.4 TP5A.1@19.9,-16.5
NetTP5B_1: TP5B.1 U6B.29 | length 2
  Top Layer w0.2: v1(15.565,17.4) 15.646,17.4 15.746,17.3 16.35,17.3 U6B.29@16.5,17.15
  Bottom Layer w0.2: v1(15.565,17.4) 15.615,17.45 16.45,17.45 TP5B.1@16.5,17.5
NetTP6A_1: TP6A.1 U6A.30 | length 1.6
  Bottom Layer w0.2: U6A.30@17.25,-17.2 17.35,-17.3 18.7,-17.3 TP6A.1@18.8,-17.4
NetTP6B_1: TP6B.1 U6B.30 | length 2.8
  Top Layer w0.2: v1(15.4,18.9) 15.457,18.843 15.457,18.518 15.776,18.2 15.9,18.2 16.15,17.95 U6B.30@16.5,17.95
  Bottom Layer w0.2: v1(15.4,18.9) 15.45,18.95 16.45,18.95 TP6B.1@16.5,19
NetTP7A_1: pad.1@5.8,-6.7 TP7A.1 U6A.21 | length 15.8
  Top Layer w0.2: pad.1@5.8,-6.7 5.931,-6.7 8.1,-8.869 TP7A.1@8.1,-10 8.1,-11.305 7.7,-11.705 v1(7.7,-13.107)
  X w0.2: v1(7.7,-13.107) 7.738,-13.145 8.388,-13.145 9.549,-14.307 10.046,-14.307 10.654,-13.7 v1(13.125,-13.7)
  Bottom Layer w0.2: v1(13.125,-13.7) 13.125,-13.646 13.4,-13.371 U6A.21@13.4,-11.75
NetTP7B_1: TP7B.1 U6B.21 | length 2.3
  Top Layer w0.2: v1(12.6,13.361) 12.625,13.336 12.625,12.525 U6B.21@12.65,12.5
  Bottom Layer w0.2: TP7B.1@12.4,12 12.543,12.143 12.543,13.304 v1(12.6,13.361)
NetTP8A_1: TP8A.1 U6A.27 | length 2.7
  Bottom Layer w0.2: U6A.27@17.25,-14.8 17.3,-14.75 19.85,-14.75 TP8A.1@19.9,-14.7
NetTP8B_1: TP8B.1 U6B.27 | length 1.6
  Top Layer w0.2: U6B.27@16.5,15.55 16.525,15.525 18.075,15.525 TP8B.1@18.1,15.5
NetTP9A_1: TP9A.1 U6A.28 | length 4.3
  Bottom Layer w0.2: U6A.28@17.25,-15.6 17.305,-15.545 18.15,-15.545 18.545,-15.15 19.219,-15.15 19.569,-15.5 TP9A.1@21.2,-15.5
NetTP9B_1: TP9B.1 U6B.28 | length 3.3
  Top Layer w0.2: U6B.28@16.5,16.35 16.506,16.344 19.744,16.344 TP9B.1@19.75,16.337
NetTP13A_1: TP13A.1 U6A.2 | length 1.6
  Bottom Layer w0.2: U6A.2@15,-20.25 15,-21 v1(15.6,-21.6)
NetTP13B_1: TP13B.1 U6B.2 | length 2.5
  Top Layer w0.2: U6B.2@14.25,21 14.25,21.35 14.5,21.6 14.5,21.724 14.85,22.074 15.374,22.074 v1(15.4,22.1)
  Bottom Layer w0.2: TP13B.1@15.4,21.5 v1(15.4,22.1)
NRSTA: R8A.1 U1A.1 U6A.4 | length 6.3
  Top Layer w0.2: v1(9.95,-21.5) 10.555,-20.895 v1(13.5,-20.895)
  Bottom Layer w0.2: U1A.1@9.4,-21.55 9.45,-21.5 v1(9.95,-21.5) ; U6A.4@13.4,-20.25 13.5,-20.35 v1(13.5,-20.895) 13.8,-21.195 R8A.1@13.8,-22
NRSTB: R8B.1 U1B.1 U6B.4 | length 6.8
  Top Layer w0.2: U6B.4@12.65,21 12.65,22.096 12.9,22.346 v1(12.9,22.4)
  Bottom Layer w0.2: U1B.1@9.7,22.05 9.85,22.2 9.85,22.595 10.205,22.95 12.595,22.95 12.8,22.745 12.8,22.554 12.9,22.454 v1(12.9,22.4) R8B.1@14,22.4
PRIMARY_OUT_EN_1: Q3A.1 R3A.2 U6A.14 | length 22.9
  X w0.2: v1(-1.712,-8.8) -0.627,-8.8 -0.092,-8.265 3.286,-8.265 3.618,-8.597 v1(7.05,-8.597)
  Y w0.2: v1(-1.725,-12.437) -1.712,-12.425 v1(-1.712,-8.8) ; v1(7.05,-8.597) 7.088,-8.635 7.088,-9.17 7.365,-9.447 7.365,-12.594 7.1,-12.859 7.1,-13.4 7.164,-13.464 7.164,-14.096 7.264,-14.196 v1(7.264,-14.25)
  Bottom Layer w0.2: Q3A.1@-2.475,-12.437 R3A.2@-2.475,-10.747 ; Q3A.1@-2.475,-12.397 -2.435,-12.437 v1(-1.725,-12.437) ; v1(7.264,-14.25) 7.318,-14.25 7.768,-14.7 8.65,-14.7 U6A.14@8.75,-14.8
PRIMARY_OUT_EN_2: Q3B.1 R3B.2 U6A.15 | length 32.6
  X w0.2: v1(-14.95,-8.15) -13.421,-8.15 -13.198,-7.928 -10.871,-7.928 -10.798,-8 v1(-2.4,-8)
  Y w0.2: v1(-2.4,-8) -2.346,-8 -2.146,-8.2 3.397,-8.2 3.6,-7.997 7.299,-7.997 7.65,-8.348 7.65,-8.931 8.3,-9.581 8.3,-13.356 7.949,-13.707 7.947,-13.707 7.854,-13.8 v1(7.8,-13.8)
  Bottom Layer w0.2: R3B.2@-15.7,-6.8 Q3B.1@-15.7,-8.45 -15.4,-8.15 v1(-14.95,-8.15) ; v1(7.8,-13.8) 7.854,-13.8 7.954,-13.9 8.65,-13.9 U6A.15@8.75,-14
PRIMARY_OUT_SENSE_1: C13A.1 R11A.1 R12A.2 U6A.12 | length 12.3
  Top Layer w0.2: R11A.1@5.425,-8.497 5.425,-15.737 5.375,-15.737 5.375,-16.997 v1(6.072,-16.3)
  Bottom Layer w0.2: v1(6.072,-16.3) 6.154,-16.3 6.254,-16.4 U6A.12@8.75,-16.4
PRIMARY_OUT_SENSE_2: C13B.1 R11B.1 R12B.2 U6A.13 | length 26.9
  Top Layer w0.2: C13B.1@-7.875,-13.05 C13B.1@-7.85,-13.05 ; R11B.1@-7.8,-4.55 -7.8,-11.79 -7.85,-11.79 C13B.1@-7.85,-13.05 ; v1(-6.849,-14.051) C13B.1@-7.85,-13.05
  X w0.2: v1(-6.849,-14.051) -0.978,-14.051 0.741,-15.77 2.209,-15.77 2.993,-14.986 v1(6.15,-14.986)
  Bottom Layer w0.2: v1(6.15,-14.986) 6.764,-15.6 U6A.13@8.75,-15.6
PRIMARY_VBATT_1: D8A.1 Q1A.5 Q1A.6 Q1A.7 Q1A.8 Q6A.5 Q6A.6 Q6A.7 Q6A.8 R1A.1 R2A.2 | length 25.4
  Top Layer w0.2: v1(-3.925,-20.2) -2.8,-20.2 ; Q6A.5@-0.931,-21.037 R2A.2@0.575,-21.037 0.575,-20.289 -0.325,-19.389 -0.325,-18.105 -0.1,-17.88 v1(-0.1,-16.6) ; D8A.1@11,-13 11.45,-13 11.6,-13.15 11.6,-16.146 11.216,-16.53 v1(11.216,-16.584)
  X w0.2: v1(-0.1,-16.6) -0.062,-16.638 0.195,-16.638 0.327,-16.77 2.623,-16.77 2.793,-16.6 5.595,-16.6 5.845,-16.85 6.3,-16.85 6.55,-16.6 11.2,-16.6 v1(11.216,-16.584)
  Bottom Layer w0.2: v1(-3.925,-20.2) -3.888,-20.163 -3.888,-19.65 -3.475,-19.237 R1A.1@-2.725,-19.237
PRIMARY_VBATT_2: D8A.2 Q1B.5 Q1B.6 Q1B.7 Q1B.8 Q6B.5 Q6B.6 Q6B.7 Q6B.8 R1B.1 R2B.2 | length 35.5
  Top Layer w0.2: v1(-17.15,-16.1) -15.622,-16.1 Q1B.6@-15.575,-16.053 ; Q6B.5@-14.156,-17.09 R2B.2@-12.65,-17.09 -12.95,-16.79 v1@-12.95,-15.971 ; v1(9.1,-10.6) 9.181,-10.6 9.481,-10.9 10.8,-10.9 D8A.2@11,-11.1
  X w0.2: v1(-13.253,-12) -11.69,-12 -11.687,-12 -7.032,-11.932 -6.86,-11.76 3.161,-11.76 3.871,-11.05 8.65,-11.05 v1(9.1,-10.6)
  Y w0.2: v1(-13.253,-12) -13.253,-12.02 -13.5,-12.267 -13.5,-15.621 v1(-13.039,-16.081)
  Bottom Layer w0.2: v1(-17.15,-16.1) -17.093,-16.042 -17.093,-15.683 -16.7,-15.29 R1B.1@-15.95,-15.29
PRIMARY_VBATT_SENSE_1: C12A.1 R2A.1 R4A.2 U6A.10 | length 8.8
  Top Layer w0.2: R2A.1@1.975,-21.037 3.548,-21.037 3.775,-20.81 R4A.2@3.775,-20.237 ; R4A.2@3.775,-20.137 4.975,-20.137 4.975,-20.097 5.475,-19.597 5.499,-19.597 5.947,-19.15 5.947,-18.653 v1(6,-18.6)
  Bottom Layer w0.2: v1(6,-18.6) 6,-18.519 6.204,-18.315 6.204,-18.167 6.345,-18.026 8.724,-18.026 U6A.10@8.75,-18
PRIMARY_VBATT_SENSE_2: C12B.1 R2B.1 R4B.2 U6A.11 | length 25.1
  Top Layer w0.2: R2B.1@-11.25,-17.09 v1(-9.45,-17.09) R4B.2@-9.45,-16.29 ; R4B.2@-9.45,-16.19 -8.25,-16.19 C12B.1@-8.25,-16.175
  X w0.2: v1(-9.45,-17.09) -0.388,-17.09 -0.308,-17.17 4.72,-17.17 5.35,-17.8 8.046,-17.8 8.646,-17.2 v1(10,-17.2)
  Bottom Layer w0.2: U6A.11@8.75,-17.2 v1(10,-17.2)
RST_SWA: C8A.1 J5A.9 U1A.3 | length 41.7
  Top Layer w0.2: v1(-17.95,-15.05) -17,-14.1 -17,-9.926 -17.176,-9.75 -17.9,-9.75 J5A.9@-17.95,-9.7
  X w0.2: v1(-17.95,-15.05) -15.499,-15.05 -13.749,-13.3 -10.415,-13.3 -8.665,-15.05 v1(-5.25,-15.05)
  Y w0.2: v1(-5.25,-15.05) v1(3.1,-23.4)
  Bottom Layer w0.2: v1(3.1,-23.4) 3.151,-23.451 3.151,-23.95 3.548,-24.347 9.053,-24.347 9.4,-24 U1A.3@9.4,-23.45 10.5,-23.45 10.8,-23.15 C8A.1@10.8,-23.125
RST_SWB: C8B.1 J5B.9 U1B.3 | length 47.1
  Top Layer w0.2: v1(-19.1,6.2) J5B.9@-17.95,6.2
  X w0.2: v1(-19.1,6.2) -15.5,6.2 -14.2,7.5 -10.9,7.5 -9.6,8.8 v1(-6,8.8) ; v1(-6.4,20.5) -5.85,21.05 4.25,21.05 4.6,21.4 5.3,21.4 5.85,20.85 7.431,20.85 7.572,20.991 7.572,21.091 7.8,21.319 v1(7.8,21.4)
  Y w0.2: v1(-6.4,20.5) -6.4,14.904 -5.95,14.454 -5.95,8.85 v1(-6,8.8) ; v1@7.8,21.319 v1(7.8,21.4)
  Bottom Layer w0.2: C8B.1@5,24.475 5,24.45 5.775,23.675 6.532,23.675 7.007,23.199 7.007,22.993 7.8,22.2 U1B.3@7.8,22.05 v1(7.8,21.4)
SECONDARY_OUT_EN_1: Q3C.1 R3C.2 U6B.14 | length 8.5
  Top Layer w0.2: v1(5,15.2) 5.078,15.2 5.428,15.55 U6B.14@8,15.55
  Y w0.2: v1(2.7,12.44) 4.48,14.22 4.48,14.68 v1(5,15.2)
  Bottom Layer w0.2: R3C.2@3.45,10.75 Q3C.1@3.45,12.4
SECONDARY_OUT_EN_2: Q3D.1 R3D.2 U6B.15 | length 26.5
  Top Layer w0.2: v1(5.9,14.828) 5.939,14.789 7.961,14.789 U6B.15@8,14.75
  X w0.2: v1(-9.3,7.9) -3.626,7.9 -3.208,8.318 v1@5.9,8.318
  Y w0.2: v1(5.9,8.3) v1(5.9,14.828)
  Bottom Layer w0.2: v1(-9.3,7.9) -8.59,7.9 Q3D.1@-8.55,7.86 ; R3D.2@-8.55,6.21 Q3D.1@-8.55,7.9
SECONDARY_OUT_SENSE_1: C13C.1 R11C.1 R12C.2 U6B.12 | length 21.9
  Top Layer w0.2: R11C.1@-4.45,8.5 R12C.2@-4.45,15.74 ; R12C.2@-4.45,15.75 -4.45,16.995 -3.695,17.75 v1(-2,17.75) ; v1(4.9,17.7) 6.25,17.7 6.8,17.15 U6B.12@8,17.15
  Y w0.2: v1(-2,17.75) -1.371,17.75 -0.871,17.25 1.749,17.25 2.199,17.7 v1(4.9,17.7)
SECONDARY_OUT_SENSE_2: C13D.1 R11D.1 R12D.2 U6B.13 | length 45.7
  Top Layer w0.2: R11D.1@-16.45,3.96 -16.45,11.2 -16.4,11.2 -16.4,12.46 C13D.1@-16.375,12.46 ; U6B.13@8,16.35 8.025,16.375 9.275,16.375 v1(9.3,16.4)
  X w0.2: v1(-13.8,15.7) -13.79,15.71 -10.447,15.71 -10.087,15.35 -2.152,15.35 -1.379,16.122 0.379,16.122 0.554,15.948 3.1,15.948 7.598,15.948 8,16.35 9.25,16.35 v1(9.3,16.4)
  Y w0.2: v1(-16.5,4.8) -16.5,13 v1(-13.8,15.7)
SECONDARY_VBATT_1: D8B.1 Q1C.5 Q1C.6 Q1C.7 Q1C.8 Q6C.5 Q6C.6 Q6C.7 Q6C.8 R1C.1 R2C.2 | length 6.7
  Top Layer w0.2: R2C.2@0.4,21.04 Q6C.5@1.906,21.04 ; Q6C.7@3.325,20.997 3.732,20.591 v1(4.9,20.591)
  Bottom Layer w0.2: D8B.1@3.3,20.55 3.341,20.591 v1(4.9,20.591) 4.843,20.533 4.843,20.333 3.75,19.24 R1C.1@3.7,19.24
SECONDARY_VBATT_2: D8B.2 Q1D.5 Q1D.6 Q1D.7 Q1D.8 Q6D.5 Q6D.6 Q6D.7 Q6D.8 R1D.1 R2D.2 | length 21.6
  Top Layer w0.2: R2D.2@-11.6,16.5 Q6D.5@-10.094,16.5 ; -8.9,15.9 v1(-7.1,15.9)
  X w0.2: v1(-7.1,20.7) -6.35,21.45 0.864,21.45 1.116,21.702 v1(1.197,21.702)
  Y w0.2: v1(-7.1,15.9) v1(-7.1,20.7)
  Bottom Layer w0.2: R1D.1@-8.3,14.7 -7.1,14.7 v1(-7.1,15.9) ; v1(1.197,21.702) 1.902,21.702 2.65,22.45 D8B.2@3.3,22.45
SECONDARY_VBATT_SENSE_1: C12C.1 R2C.1 R4C.2 U6B.10 | length 16.6
  Top Layer w0.2: C12C.1@-4,20.125 -4,20.14 R4C.2@-2.8,20.14 ; R4C.2@-2.8,20.24 -2.8,21.04 R2C.1@-1,21.04 v1(-1,22.1) ; v1(6.9,21.4) 6.9,21.346 7.05,21.196 7.05,19.155 7.355,18.85 7.9,18.85 U6B.10@8,18.75
  X w0.2: v1(-1,22.1) -0.972,22.072 0.789,22.072 0.969,22.252 1.425,22.252 1.605,22.072 5.314,22.072 5.985,21.4 v1(6.9,21.4)
SECONDARY_VBATT_SENSE_2: C12D.1 R2D.1 R4D.2 U6B.11 | length 29.9
  Top Layer w0.2: C12D.1@-16,15.585 -16,15.6 R4D.2@-14.8,15.6 ; R4D.2@-14.8,15.7 -14.8,16.5 v1(-14.1,16.5) R2D.1@-13,16.5 ; U6B.11@8,17.95 8.025,17.975 9.475,17.975 v1(9.5,18)
  X w0.2: v1(-14.1,16.5) -1.567,16.5 -1.545,16.522 2.622,16.522 3.7,17.6 4.189,17.6 4.639,17.15 5.128,17.15 5.8,17.822 5.8,17.833 5.917,17.95 9.45,17.95 v1(9.5,18)
SWCLKA: J8A.4 U6A.24 | length 26.1
  X w0.2: v1(6.475,-11.6) 14.9,-11.6 v1(15.8,-10.7)
  Y w0.2: v1(6.475,-11.6) 5.2,-12.875 5.2,-21.247 5.15,-21.297 5.15,-21.753 5.2,-21.803 5.2,-21.95 5.801,-22.552 6.04,-22.552 6.507,-23.019 6.507,-23.257 v1(8.25,-25)
  Bottom Layer w0.2: U6A.24@15.8,-11.75 v1(15.8,-10.7)
SWCLKB: J8B.4 U6B.24 | length 15.9
  Top Layer w0.2: J8B.4@8.75,23.25 8.75,20.331 9.006,20.075 v1(9.006,19.994) ; v1(11.7,15.2) 13.383,15.2 15.05,13.533 U6B.24@15.05,12.5
  X w0.2: v1(9.4,15.3) 9.454,15.3 9.554,15.2 v1(11.7,15.2)
  Y w0.2: v1(9.006,19.994) 9.006,19.94 8.838,19.772 8.838,16.787 8.7,16.649 8.7,16.151 8.838,16.013 8.838,15.862 v1(9.4,15.3)
SWDIOA: J8A.2 U6A.23 | length 20.2
  Y w0.2: v1(9.52,-25) 9.52,-23.88 10.975,-22.425 11.028,-22.425 11.35,-22.103 11.35,-22.05 13.05,-20.35 13.05,-17.811 12.551,-17.312 12.551,-15.173 13.675,-14.049 13.675,-12.942 12.5,-11.767 v1(12.5,-10.7)
  Bottom Layer w0.2: v1(12.5,-10.7) 14.495,-10.7 14.9,-11.105 14.9,-11.65 U6A.23@15,-11.75
SWDIOB: J8B.2 U6B.23 | length 14.9
  Top Layer w0.2: J8B.2@10.02,23.25 10.133,23.137 10.413,23.137 10.462,23.088 11.938,23.088 v1(12.4,23.55) ; v1(12.4,14.461) 12.418,14.443 12.95,14.443 13.05,14.343 13.232,14.343 14.25,13.325 U6B.23@14.25,12.5
  Y w0.2: v1(12.4,14.461) 12.4,22.122 12.35,22.172 12.35,22.628 12.4,22.678 v1(12.4,23.55)
USART2_RXA: J5A.5 R37A.1 U6A.20 | length 60.4
  Top Layer w0.2: v1(-19.4,-7.7) J5A.5@-17.95,-7.7
  X w0.2: v1(-17,-20.8) -14.559,-20.8 -13.559,-21.8 -11.379,-21.8 -10.379,-20.8 3.142,-20.8 3.267,-20.675 7.002,-20.675 7.096,-20.769 10.831,-20.769 v1(12.5,-19.1)
  Bottom Layer w0.2: R37A.1@-23.5,-8.95 -23.45,-9 -19.4,-9 ; v1(-19.4,-7.7) -19.4,-9 ; v1(-17,-20.8) -17,-19.067 -16.6,-18.667 -16.6,-17.114 -17.015,-16.7 -17.328,-16.7 -17.7,-16.328 -17.7,-15.578 -17.4,-15.278 -17.4,-14.299 -17.7,-13.999 -17.7,-9 -19.4,-9 ; v1(12.5,-19.1) 12.5,-19.046 12.176,-18.722 12.176,-17.179 12.4,-16.956 12.4,-16.044 12.176,-15.821 12.176,-12.719 12.5,-12.395 12.5,-11.85 U6A.20@12.6,-11.75
USART2_RXB: J5B.5 R37B.1 U6B.20 | length 38.7
  Top Layer w0.2: v1(-19.1,8.2) J5B.5@-17.95,8.2 ; v1(11.779,13.473) 11.815,13.437 11.815,12.535 U6B.20@11.85,12.5
  X w0.2: v1(-19.1,8.2) -16.3,8.2 -12.738,11.762 -5.738,11.762 10.7,11.762 11.8,12.862 11.8,13.452 v1(11.779,13.473)
  Bottom Layer w0.2: R37B.1@-22.2,8.2 v1(-19.1,8.2)
USART2_TXA: J5A.3 U6A.19 | length 50.8
  Top Layer w0.2: J5A.3@-17.95,-6.7 v1(-17.017,-6.7)
  X w0.2: v1(-17.2,-18.4) -4.876,-18.4 -2.979,-20.297 3.079,-20.297 3.757,-19.619 9.815,-19.619 9.943,-19.747 10.707,-19.747 v1(11.536,-18.918)
  Y w0.2: v1(-17.2,-18.4) -17.2,-17.347 -17.7,-16.847 -17.7,-15.578 -17.3,-15.178 -17.3,-8.572 -17.017,-8.289 v1(-17.017,-6.7)
  Bottom Layer w0.2: v1(11.536,-18.918) 11.5,-18.882 11.5,-17.599 11.6,-17.499 11.6,-17.049 11.9,-16.749 11.9,-16.251 11.676,-16.028 11.676,-12.512 11.7,-12.488 11.7,-11.85 U6A.19@11.8,-11.75
USART2_TXB: J5B.3 U6B.19 | length 34
  Top Layer w0.2: v1(-19.1,9.2) J5B.3@-17.95,9.2 ; v1(11.002,13.498) 11.025,13.475 11.025,12.525 U6B.19@11.05,12.5
  X w0.2: v1(-19.1,9.2) -16.2,9.2 -13.122,12.278 0.213,12.278 0.926,12.99 10.49,12.99 10.998,13.498 v1(11.002,13.498)
pads on no net: FID1.0 FID2.0 FID3.0 FID4.0 FID5.0 FID6.0 J2.11 J4A.0 J4B.0 J5A.0 J5B.0 J6.11 J7A.11 J7B.11 J8A.0 J8B.0 J9.11 U1A.4 U1B.4 U6A.8 U6B.8 Z1.1 Z1.2 Z1.3 Z2.1 Z2.2 Z2.3 Z4.1 Z4.2 Z4.3 Z5.1 Z5.2 Z5.3 Z6.1 Z6.2 Z6.3